# Altium PCB PCB_WMR.PcbDoc
Units mm, origin at the board's own origin, x right, y up, seen from the top; angles counter-clockwise.
Board outline 87.88 x 60.96 mm, 2 copper layers (Top Layer, Bottom Layer); 12 components, 24 nets, 87 pads, 0 vias.
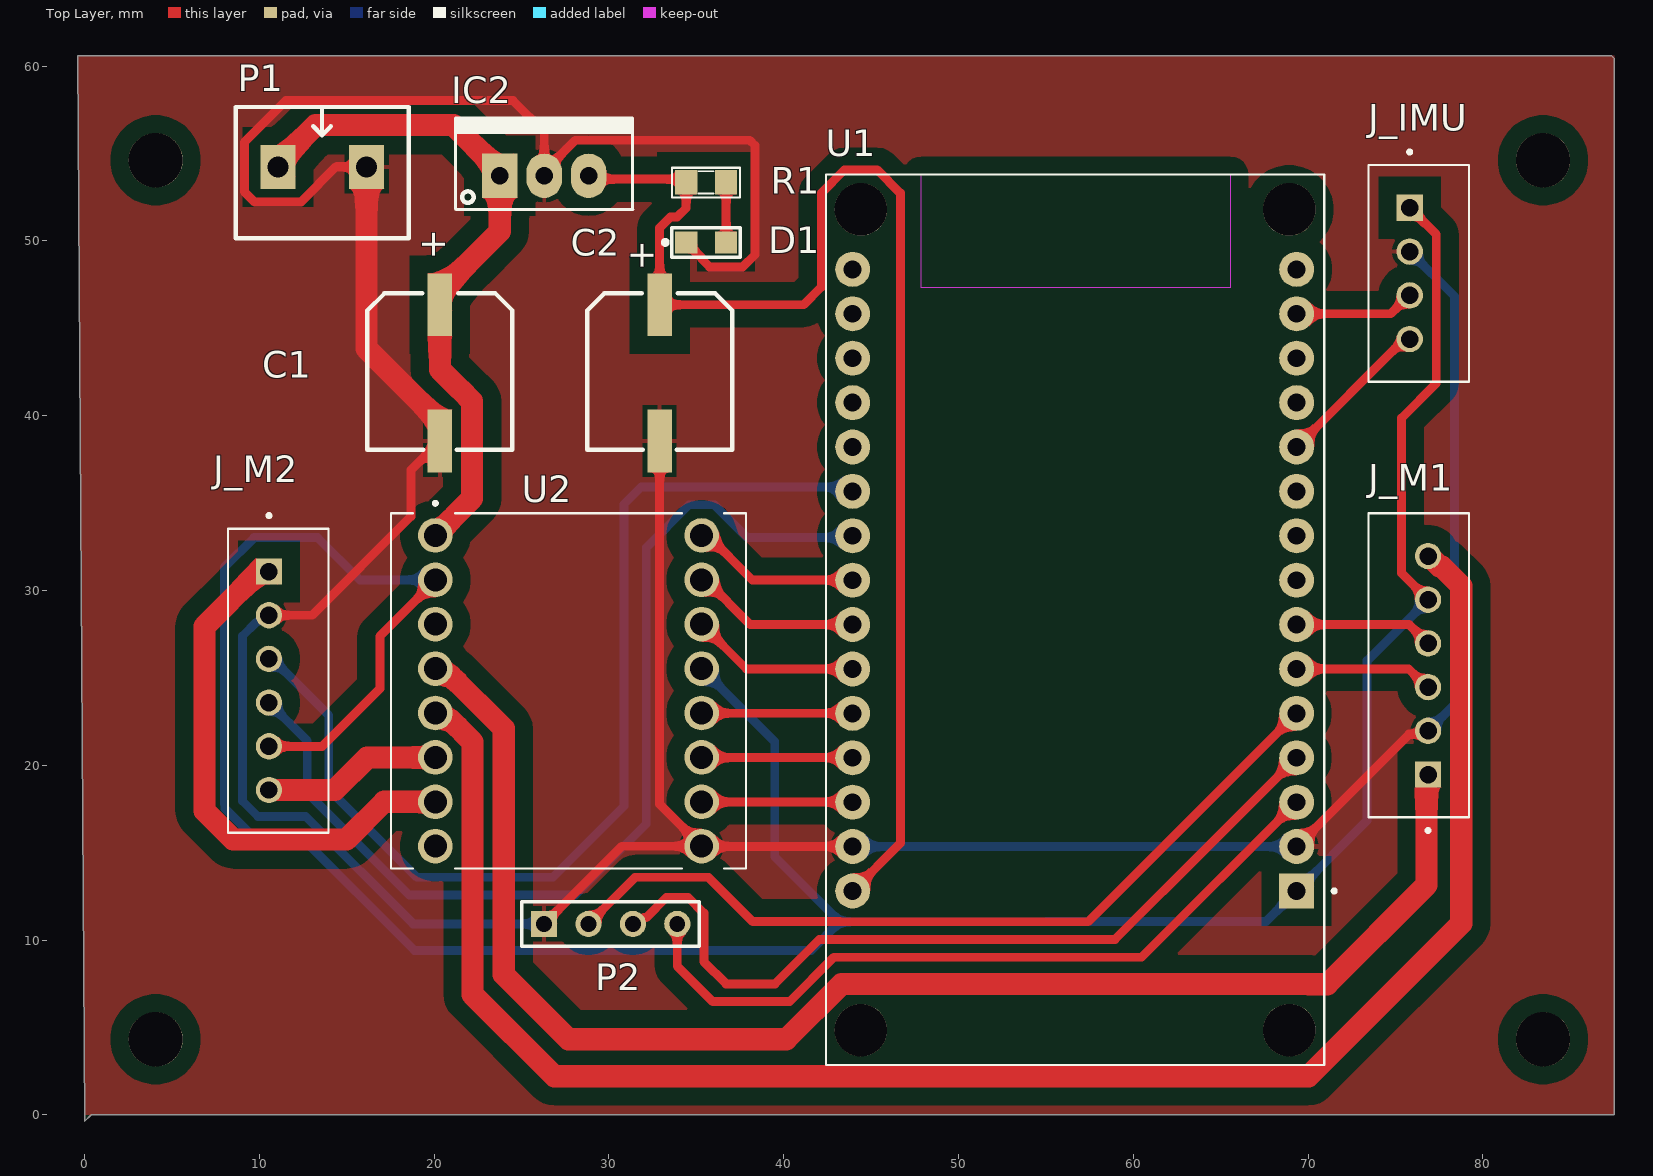
[diagram p0: Top Layer view]
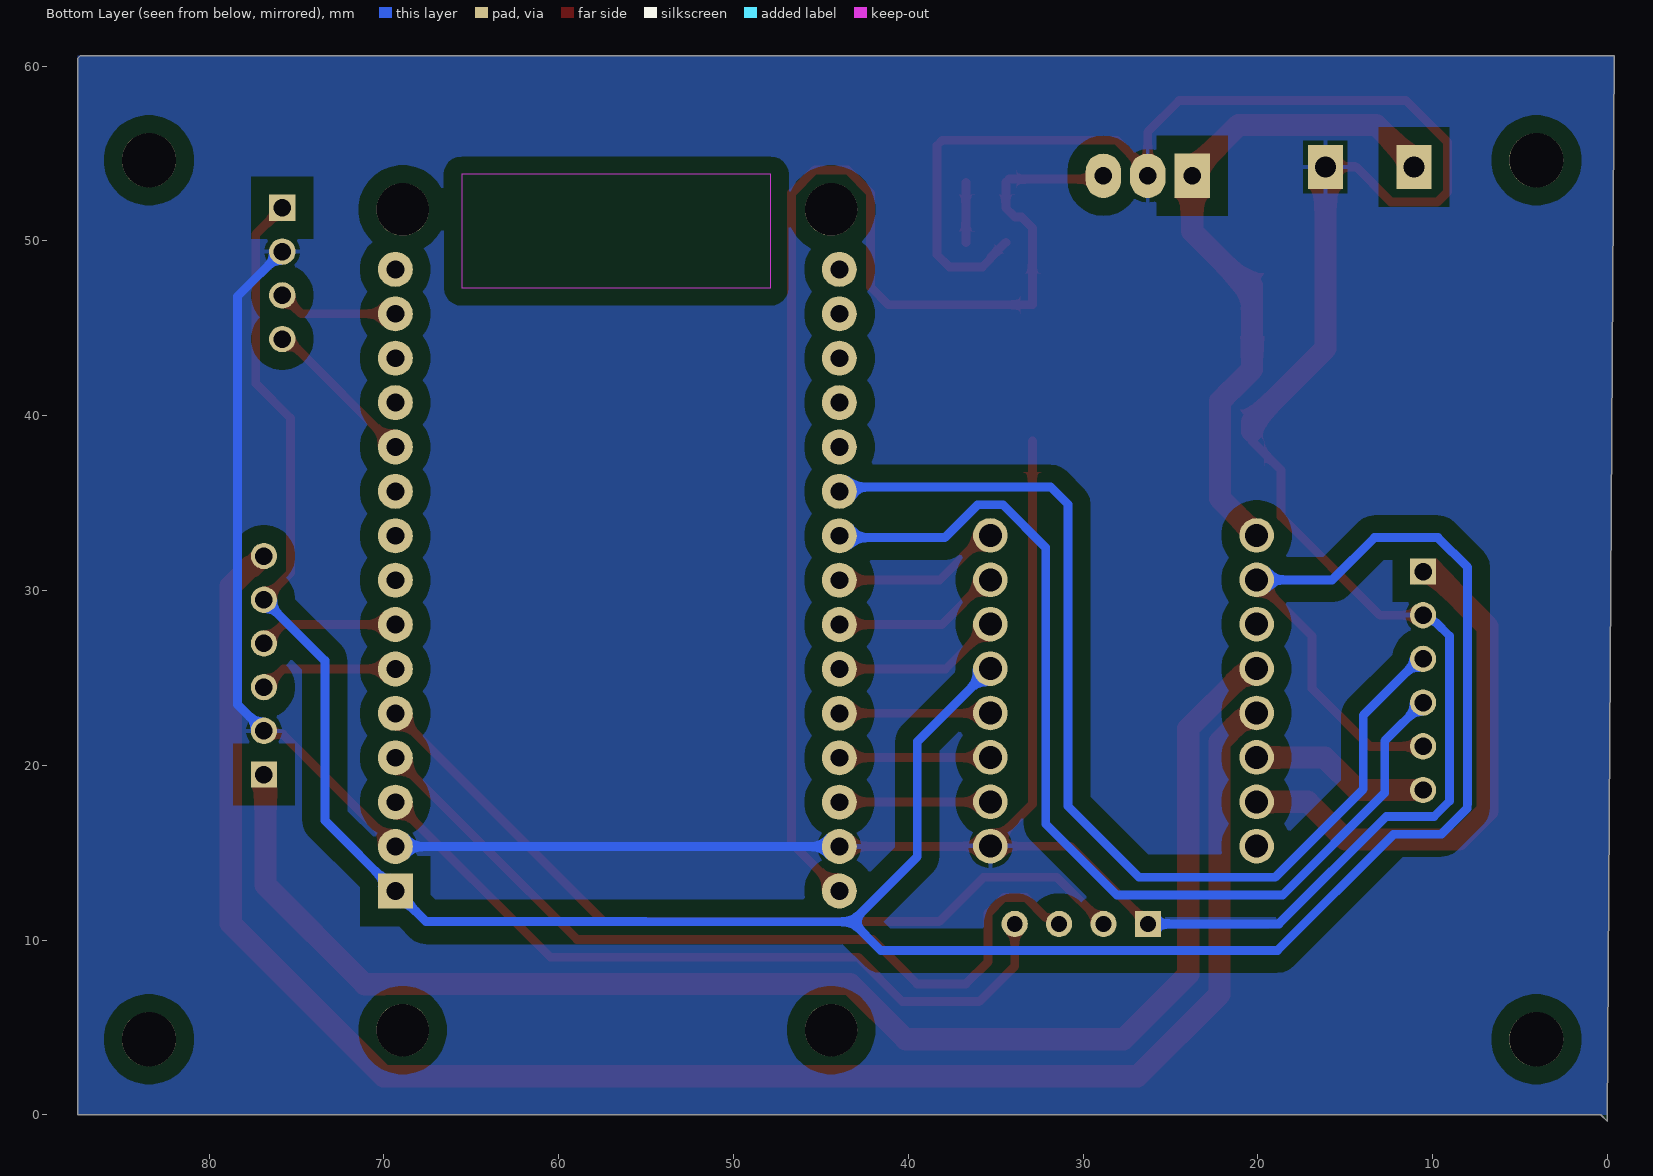
[diagram p1: Bottom Layer view, seen from below]
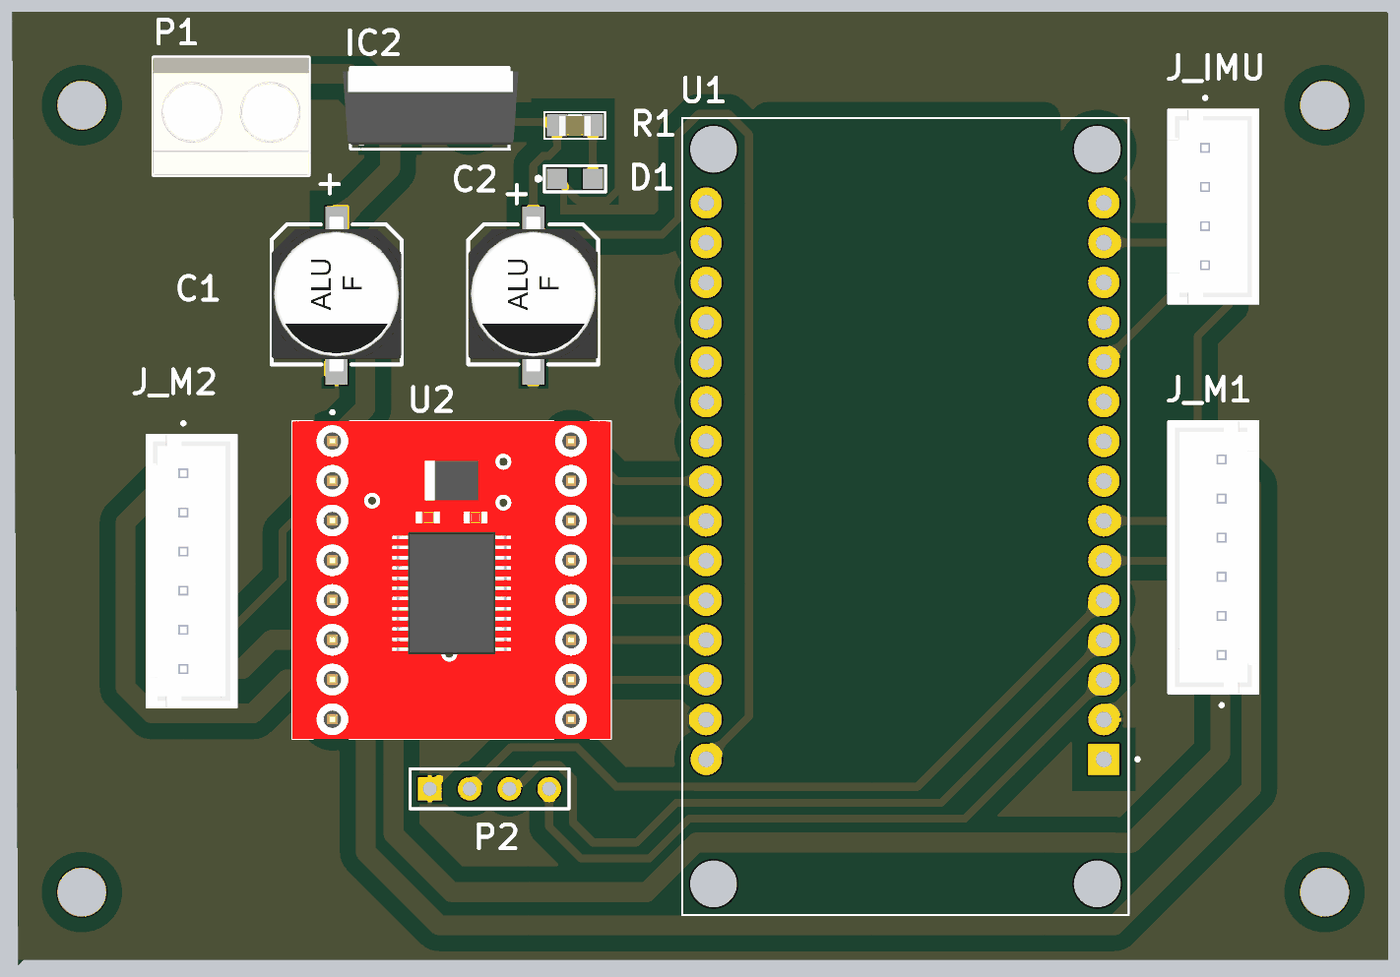
[diagram p2: 3D render of the assembled board from above, using the file's embedded part models]

## Layer stack, top to bottom
Top Solder: solder mask 0.0102, Solder Resist, Dk 3.5
Top Layer: signal copper 0.0356
Dielectric 1: dielectric 0.32, FR-4, Dk 4.8
Bottom Layer: signal copper 0.0356
Bottom Solder: solder mask 0.0102, Solder Resist, Dk 3.5

## Board outline
-0.381,60.579 87.376,60.579 87.503,60.452 87.503,0 0.381,0 0,-0.381

## Design rules (kind name [scope] priority, off if disabled: settings)
Clearance [All] p1: gap=1.016 ignorepadtopadclearanceinfootprint=FALSE
HoleSize [All] p1: absolutevalues=TRUE maxlimit=5.08 minlimit=0.025 maxpercent=80.000 minpercent=20.000
PolygonConnect [All] p1: connectstyle=Relief reliefconductorwidth=0.254 reliefentries=4 polygonreliefangle="90 Angle" airgapwidth=0.254
RoutingVias [All] p1: holewidth=0.508 width=0.889 viastyle="Through Hole" minholewidth=0.381 minwidth=0.635 maxholewidth=0.711 maxwidth=1.27
SilkToSilkClearance [IsText] p1: silktosilkclearance=0.254
SilkToSolderMaskClearance [IsText] p1: minsilkscreentomaskgap=0.254 clearancetoexposedcopper=TRUE
SolderMaskExpansion [All] p1: expansion=0.102 istentingtop=FALSE
Width [All] p1: maxlimit=1.27 minlimit=0.254 preferedwidth=0.508
27 further rules are at their usual default settings.

## Components (designator, comment, footprint, x,y, rotation, side; value= is the part's Value field where it differs from the comment)
C1 "220uF/35V" CAP_ALUM_SMD_80102_TYPE_F 20.328,42.545 r270 top
C2 "220uF/35V" CAP_ALUM_SMD_80102_TYPE_F 32.901,42.545 r270 top
D1 "LED3" LED0805 35.56,49.911 r0 top
IC2 "LM7805" QTO-220 23.757,53.721 r0 top
J_IMU "B4B-XH-A(LF)(SN)" JST_B4B-XH-A(LF)(SN) 76.335,48.133 r270 top
J_M1 "B6B-XH-A(LF)(SN)" JST_B6B-XH-A(LF)(SN) 76.335,25.718 r90 top
J_M2 "B6B-XH-A(LF)(SN)" JST_B6B-XH-A(LF)(SN) 11.074,24.832 r270 top
P1 "Header 2 - M" "Medium - Header 2" 13.597,54.229 r0 top
P2 "Header 4" HDR1X4 26.289,10.922 r0 top
R1 "1K" SM-0805 35.56,53.34 r0 top
U1 "ESP32-DEVKIT-V1" MODULE_ESP32_DEVKIT_V1 56.642,28.321 r180 top
U2 "ROB-14450" MODULE_ROB-14450 27.686,24.257 r0 top

## Footprints (in the part's own frame and the unit in brackets; to place one, negate y for a bottom-side part, rotate by r counter-clockwise, add the part's x,y. Pads: shape width x height; smd on the part's side, far side on the other; paste and mask are expansions set on the pad)
CAP_ALUM_SMD_80102_TYPE_F [mm]
  rect 3.6x1.4 smd: 1(-3.8,0) 2(4,0)
  silkscreen extent -4.45,-4.15 4.5,4.15, body extent -4.95,-4.15 4.95,4.15, height 10.2
HDR1X4 [mm] "Connector; Header; 4 Position"
  rect 1.5x1.5 hole 0.9: 1(0,0)
  round 1.5 hole 0.9: 2(2.54,0) 3(5.08,0) 4(7.62,0)
  silkscreen extent -1.27,-1.27 8.89,1.27
JST_B4B-XH-A(LF)(SN) [mm]
  rect 1.508x1.508 / inner round 1.508 / far side rect 1.508x1.508 hole 1: 1(-3.75,-0.525)
  round 1.508 hole 1: 2(-1.25,-0.525) 3(1.25,-0.525) 4(3.75,-0.525)
  silkscreen extent -7.05,-2.87 6.2,2.88, body extent -6.2,-2.88 6.2,2.88, height 7
JST_B6B-XH-A(LF)(SN) [mm]
  rect 1.508x1.508 hole 1: 1(-6.25,-0.525)
  round 1.508 hole 1: 2(-3.75,-0.525) 3(-1.25,-0.525) 4(1.25,-0.525) 5(3.75,-0.525) 6(6.25,-0.525)
  silkscreen extent -9.55,-2.88 8.7,2.87, body extent -8.7,-2.88 8.7,2.88, height 7
LED0805 [mil] "Chip Resistor; Body 2.0 x 1.3 mm (LxW typ)"
  rect 50x50 smd: 1(-45,0) 2(45,0)
  silkscreen extent -97,-33 77,33, body extent -60,-25 60,25, height 47
"Medium - Header 2" [mm]
  rect 2x2.5 hole 1.2: 1(-2.54,0) 2(2.54,0)
  silkscreen extent -4.95,-4.08 4.95,3.43, body extent -5,-4.07 5,3.43, height 10
MODULE_ESP32_DEVKIT_V1 [mm]
  rect 2x2 / inner round 2 / far side rect 2x2 hole 1.02: 1(-12.7,15.515)
  round 2 hole 1.02: 2(-12.7,12.975) 3(-12.7,10.435) 4(-12.7,7.895) 5(-12.7,5.355) 6(-12.7,2.815) 7(-12.7,0.275) 8(-12.7,-2.265) 9(-12.7,-4.805) 10(-12.7,-7.345) 11(-12.7,-9.885) 12(-12.7,-12.425) 13(-12.7,-14.965) 14(-12.7,-17.505) 15(-12.7,-20.045) 16(12.7,-20.045) 17(12.7,-17.505) 18(12.7,-14.965) 19(12.7,-12.425) 20(12.7,-9.885) 21(12.7,-7.345) 22(12.7,-4.805) 23(12.7,-2.265) 24(12.7,0.275) 25(12.7,2.815) 26(12.7,5.355) 27(12.7,7.895) 28(12.7,10.435) 29(12.7,12.975) 30(12.7,15.515)
  round 3 hole 3 unplated: ""(-12.28,23.475) ""(-12.28,-23.475) ""(12.23,23.475) ""(12.23,-23.475)
  Keep-Out Layer region: 8.78,-25.475 -8.91,-25.475 -8.91,-18.985 8.78,-18.985
  Keep-Out Layer region: 8.78,-25.475 -8.91,-25.475 -8.91,-18.985 8.78,-18.985
  silkscreen extent -14.95,-25.47 14.23,25.48
MODULE_ROB-14450 [mm]
  round 1.98 hole 1.32: 1(-7.62,8.89) 2(-7.62,6.35) 3(-7.62,3.81) 4(-7.62,1.27) 5(-7.62,-1.27) 6(-7.62,-3.81) 7(-7.62,-6.35) 8(-7.62,-8.89) 9(7.62,-8.89) 10(7.62,-6.35) 11(7.62,-3.81) 12(7.62,-1.27) 13(7.62,1.27) 14(7.62,3.81) 15(7.62,6.35) 16(7.62,8.89)
  silkscreen extent -10.16,-10.16 10.16,10.83, body extent -10.16,-10.16 10.16,10.16, height 5.5
QTO-220 [mil] "TO-220 - 1-2-3"
  rect 80x100 hole 39: 1(0,0)
  oval 80x100 hole 39: 2(100,0) 3(200,0)
  silkscreen extent -100,-76 300,130, body extent -119,-64 322,121, height 755
SM-0805 [mil] "Compoment SMD 80x50mil"
  rect 50x55 smd: 1(-45,0) 2(45,0)
  silkscreen extent -77,-34 76,33, body extent -40,-27 40,23, height 24

## Part data
C1 C2: library part EEE-FK1V221P, "CAP ALUM 220uF 20% 35V SMD", MFR=Panasonic, Category=CAPACITOR, MPN=EEE-FK1V221P, PinCount=2, Solder=SMT
D1: library part LED0805, "LED SMD 0805"
IC2: library part LM78xx, "On ap +, from + 5 to + 24VDC"
J_IMU: "Connector Header Through Hole 4 position 0.098 (2.50mm)", Package=None, Availability="In Stock", Check_prices=https://www.snapeda.com/parts/B4B-XH-A(LF)(SN)/JST+Sales+America+Inc./view-part/?ref=eda, MF="JST Sales", MP=B4B-XH-A(LF)(SN), Price=None, Purchase-URL=https://pricing.snapeda.com/search/part/B4B-XH-A(LF)(SN)/?ref=eda, SnapEDA_Link=https://www.snapeda.com/parts/B4B-XH-A(LF)(SN)/JST+Sales+America+Inc./view-part/?ref=snap
J_M1 J_M2: "Connector Header Through Hole 6 position 0.098 (2.50mm)", Package=None, Availability="In Stock", Check_prices=https://www.snapeda.com/parts/B6B-XH-A(LF)(SN)/JST+Sales+America+Inc./view-part/?ref=eda, MF="JST Sales", MP=B6B-XH-A(LF)(SN), Price=None, Purchase-URL=https://pricing.snapeda.com/search/part/B6B-XH-A(LF)(SN)/?ref=eda, SnapEDA_Link=https://www.snapeda.com/parts/B6B-XH-A(LF)(SN)/JST+Sales+America+Inc./view-part/?ref=snap
P1: "Header, 2-Pin, Medium", LatestRevisionDate=17-Jul-2002, LatestRevisionNote="Re-released for DXP Platform.", Publisher="Altium Limited"
P2: "Header, 4-Pin", LatestRevisionDate=17-Jul-2002, LatestRevisionNote="Re-released for DXP Platform.", Publisher="Altium Limited"
R1: library part RM, "Resistor SMD"
U1: "Dual core, Wi-Fi: 2.4 GHz up to 150 Mbits/s,BLE (Bluetooth Low Energy) and legacy Bluetooth, 32 bits, Up to 240 MHz", Package=None, Availability="Not in stock", Check_prices=https://www.snapeda.com/parts/ESP32-DEVKIT-V1/Do+it/view-part/?ref=eda, MF="Do it", MP=ESP32-DEVKIT-V1, Price=None, SnapEDA_Link=https://www.snapeda.com/parts/ESP32-DEVKIT-V1/Do+it/view-part/?ref=snap
U2: "TB6612FNG Motor Controller/Driver Power Management Evaluation Board", Package=None, Availability="In Stock", Check_prices=https://www.snapeda.com/parts/ROB-14450/SparkFun%20Electronics/view-part/2656367/?ref=eda, MF="SparkFun Electronics", MP=ROB-14450, Price=None, SnapEDA_Link=https://www.snapeda.com/parts/ROB-14450/SparkFun%20Electronics/view-part/2656367/?ref=snap

## Free pads (board coordinates)
  round 3.1 hole 3.1: 2(4.064,4.318) 2(4.064,54.61) 2(83.439,4.318) 2(83.439,54.61)

## Nets (pads, with @x,y where several pads share a name; then routed paths per layer and width w, separated by ;. In a path a pad name is that pad's centre, name@x,y a point inside that pad or via, vN(x,y) a via of type N, cw(c..) or ccw(c..) an arc to the next point about the centre after c; other vN are vias at no path point)
3V: J_IMU.1 J_M1.5 J_M2.5 U1.1 U2.2 U2.13 | length 170.9
  Top Layer w0.508: J_M2.5 13.589,21.082 16.891,24.384 16.891,27.37 20.066,30.545 U2.2 ; J_IMU.1 77.326,50.367 77.326,41.844 75.344,39.862 75.344,30.984 J_M1.5
  Bottom Layer w0.508: U2.2 15.739,30.607 13.326,33.02 9.696,33.02 8.001,31.325 8.001,17.78 8.017,17.764 8.017,17.533 9.5,16.05 12.232,16.05 18.883,9.398 41.566,9.398 43.212,11.044 ; U2.13 39.484,21.349 39.484,14.772 43.212,11.044 ; J_M1.5 73.378,25.986 73.378,16.842 U1.1 67.585,11.049 55.028,11.049 55.023,11.044 43.212,11.044
5V: C2.1 IC2.3 R1.1 U1.30 | length 75.3
  Top Layer w0.508: IC2.3 29.027,53.53 34.227,53.53 R1.1 34.417,51.88 33.908,51.371 33.529,51.371 32.901,50.743 C2.1 41.138,46.345 42.15,47.357 42.15,52.733 43.475,54.058 45.349,54.058 46.674,52.733 46.674,15.538 U1.30
12V: C1.1 IC2.1 P1.1 U2.1 | length 39.7
  Top Layer w1.27: P1.1 11.057,54.479 11.422,54.844 11.448,54.844 13.226,56.622 21.11,56.622 23.757,53.975 IC2.1 23.757,50.546 20.721,47.51 20.393,47.51 20.328,47.445 C1.1 20.328,42.64 21.48,41.488 21.501,41.488 22.171,40.818 22.171,35.252 U2.1
  Bottom Layer w0.508: P1.1 P1.1@11.565,53.721
A1: J_M1.1 U2.4 | length 83.8
  Top Layer w1.27: U2.4 20.258,25.527 20.665,25.12 20.95,25.12 23.977,22.093 23.977,8.027 27.686,4.318 40.146,4.318 43.317,7.489 70.017,7.489 70.04,7.465 71.092,7.465 76.77,13.143 76.77,19.378 J_M1.1
A2: J_M1.6 U2.5 | length 101.3
  Top Layer w1.27: U2.5 20.258,22.987 20.665,22.58 20.95,22.58 22.199,21.331 22.199,6.884 26.88,2.203 70.017,2.203 71.565,3.751 78.757,10.943 78.757,30.254 77.646,31.365 77.527,31.365 76.924,31.968 J_M1.6
AI1: U1.25 U2.14 | length 9.7
  Top Layer w0.508: U2.14 37.867,25.506 U1.25
AI2: U1.24 U2.15 | length 9.7
  Top Layer w0.508: U2.15 35.529,30.607 38.09,28.046 U1.24
B: P2.4 U1.3 | length 43.4
  Top Layer w0.508: P2.4 33.909,8.509 35.941,6.477 40.33,6.477 42.865,9.012 60.468,9.012 U1.3
B1: J_M2.1 U2.7 | length 30.3
  Top Layer w1.27: J_M2.1 10.43,30.963 9.881,30.963 6.858,27.94 6.858,17.399 8.509,15.748 14.986,15.748 17.145,17.907 U2.7
B2: J_M2.6 U2.6 | length 10.3
  Top Layer w1.27: J_M2.6 14.311,18.582 16.176,20.447 U2.6
BI1: U1.26 U2.12 | length 8.6
  Top Layer w0.508: U2.12 35.317,22.976 43.931,22.976 U1.26
BI2: U1.27 U2.11 | length 8.6
  Top Layer w0.508: U2.11 35.317,20.436 43.931,20.436 U1.27
ENC_1A: J_M1.3 U1.6 | length 7.9
  Top Layer w0.508: U1.6 75.754,25.506 76.792,24.468 J_M1.3
ENC_1B: J_M1.4 U1.7 | length 8
  Top Layer w0.508: U1.7 75.782,28.046 J_M1.4
ENC_2A: J_M2.3 U1.21 | length 60.5
  Bottom Layer w0.508: J_M2.3 10.748,26.082 13.97,22.86 13.97,18.622 19.003,13.589 26.797,13.589 30.861,17.653 30.861,34.925 31.851,35.915 43.693,35.915 U1.21
ENC_2B: J_M2.4 U1.22 | length 59
  Bottom Layer w0.508: J_M2.4 12.736,21.394 12.736,18.419 18.582,12.573 28.067,12.573 32.131,16.637 32.131,32.45 34.58,34.899 36.032,34.899 37.911,33.02 43.836,33.02 U1.22
G: P2.3 U1.4 | length 47.6
  Top Layer w0.508: P2.3 31.637,10.922 31.998,11.282 32.131,11.282 33.283,12.434 34.535,12.434 35.433,11.536 35.433,8.763 36.703,7.493 39.497,7.493 42.032,10.028 58.944,10.028 64.348,15.432 U1.4
GND: C1.2 C2.2 D1.1 IC2.2 J_IMU.2 J_M1.2 J_M2.2 P1.2 P2.1 U1.2 U1.29 U2.9 | length 229.3
  Top Layer w0.508: J_M2.2 13.023,28.582 18.669,34.228 18.669,36.886 C1.2 C1.2@20.328,39.095 ; P1.2 14.375,54.229 13.374,53.227 13.374,53.218 12.373,52.217 9.741,52.217 9.144,52.814 9.144,55.643 11.519,58.019 24.509,58.019 26.297,56.231 IC2.2 ; P2.1 30.734,15.367 U2.9 ; IC2.2@26.297,53.975 28.075,55.753 38.056,55.753 38.354,55.455 38.354,49.214 37.654,48.514 35.752,48.514 35.306,48.96 35.306,49.022 D1.1 ; C2.2 32.901,17.772 U2.9 ; U1.29 43.931,15.356 35.317,15.356 U2.9 ; U1.2 75.773,21.777 76.669,21.777 J_M1.2 ; J_IMU.2@75.739,49.453 J_IMU.2
  Top Layer w1.27: P1.2 16.137,43.836 20.328,39.645 C1.2@20.328,39.095
  Bottom Layer w0.508: J_M2.2 10.278,28.582 9.877,28.18 9.823,28.18 9.033,27.39 9.033,17.954 9.921,17.066 12.652,17.066 18.796,10.922 P2.1 ; U1.29 U1.2 ; J_IMU.2 78.376,46.817 78.376,23.484 J_M1.2
NetD1_2: D1.2 R1.2 | length 3.4
  Top Layer w0.508: D1.2 R1.2
PWMA: U1.23 U2.16 | length 9.7
  Top Layer w0.508: U2.16 35.651,33.147 38.212,30.586 U1.23
PWMB: U1.28 U2.10 | length 8.6
  Top Layer w0.508: U2.10 35.317,17.896 43.931,17.896 U1.28
R: P2.2 U1.5 | length 47.6
  Top Layer w0.508: P2.2 31.496,13.589 35.687,13.589 38.227,11.049 43.207,11.049 43.212,11.044 57.42,11.044 U1.5
SCL: J_IMU.3 U1.14 | length 6.9
  Top Layer w0.508: U1.14 74.723,45.826 75.779,46.883 J_IMU.3
SDA: J_IMU.4 U1.11 | length 9
  Top Layer w0.508: U1.11 75.327,44.191 75.619,44.191 J_IMU.4
pads on no net: U1. U1.8 U1.9 U1.10 U1.12 U1.13 U1.15 U1.16 U1.17 U1.18 U1.19 U1.20 U2.3 U2.8

## Polygon pours and split planes (outlines as drawn)
GND on Top Layer "GND_L01_P000" (solid, remove dead copper, pour order 0): -0.381,60.579 87.503,60.579 87.503,0 0,0
GND on Bottom Layer "GND_L02_P001" (solid, remove dead copper, pour order 1): -0.381,60.579 87.503,60.579 87.503,0 0,0

## Silkscreen, mask and mechanical layers (free items; w line width, h text height)
Mechanical 1:
  lines w1.2: -0.381,60.579 -0.002,-0.002 0,0 87.503,0 87.503,60.452 87.376,60.579 -0.381,60.579

## Text inside footprints (layer, text, board x,y; h text height)
C1: Top Overlay "+" at 19.304,50.673 h1.52 r270
C2: Top Overlay "+" at 31.242,50.038 h1.52 r270